# Altium PCB Flyback_PCB.PcbDoc
Units mm, origin at the board's own origin, x right, y up, seen from the top; angles counter-clockwise.
Board outline 106.68 x 88.9 mm, 2 copper layers (Top Layer, Bottom Layer); 95 components, 36 nets, 213 pads, 350 vias.
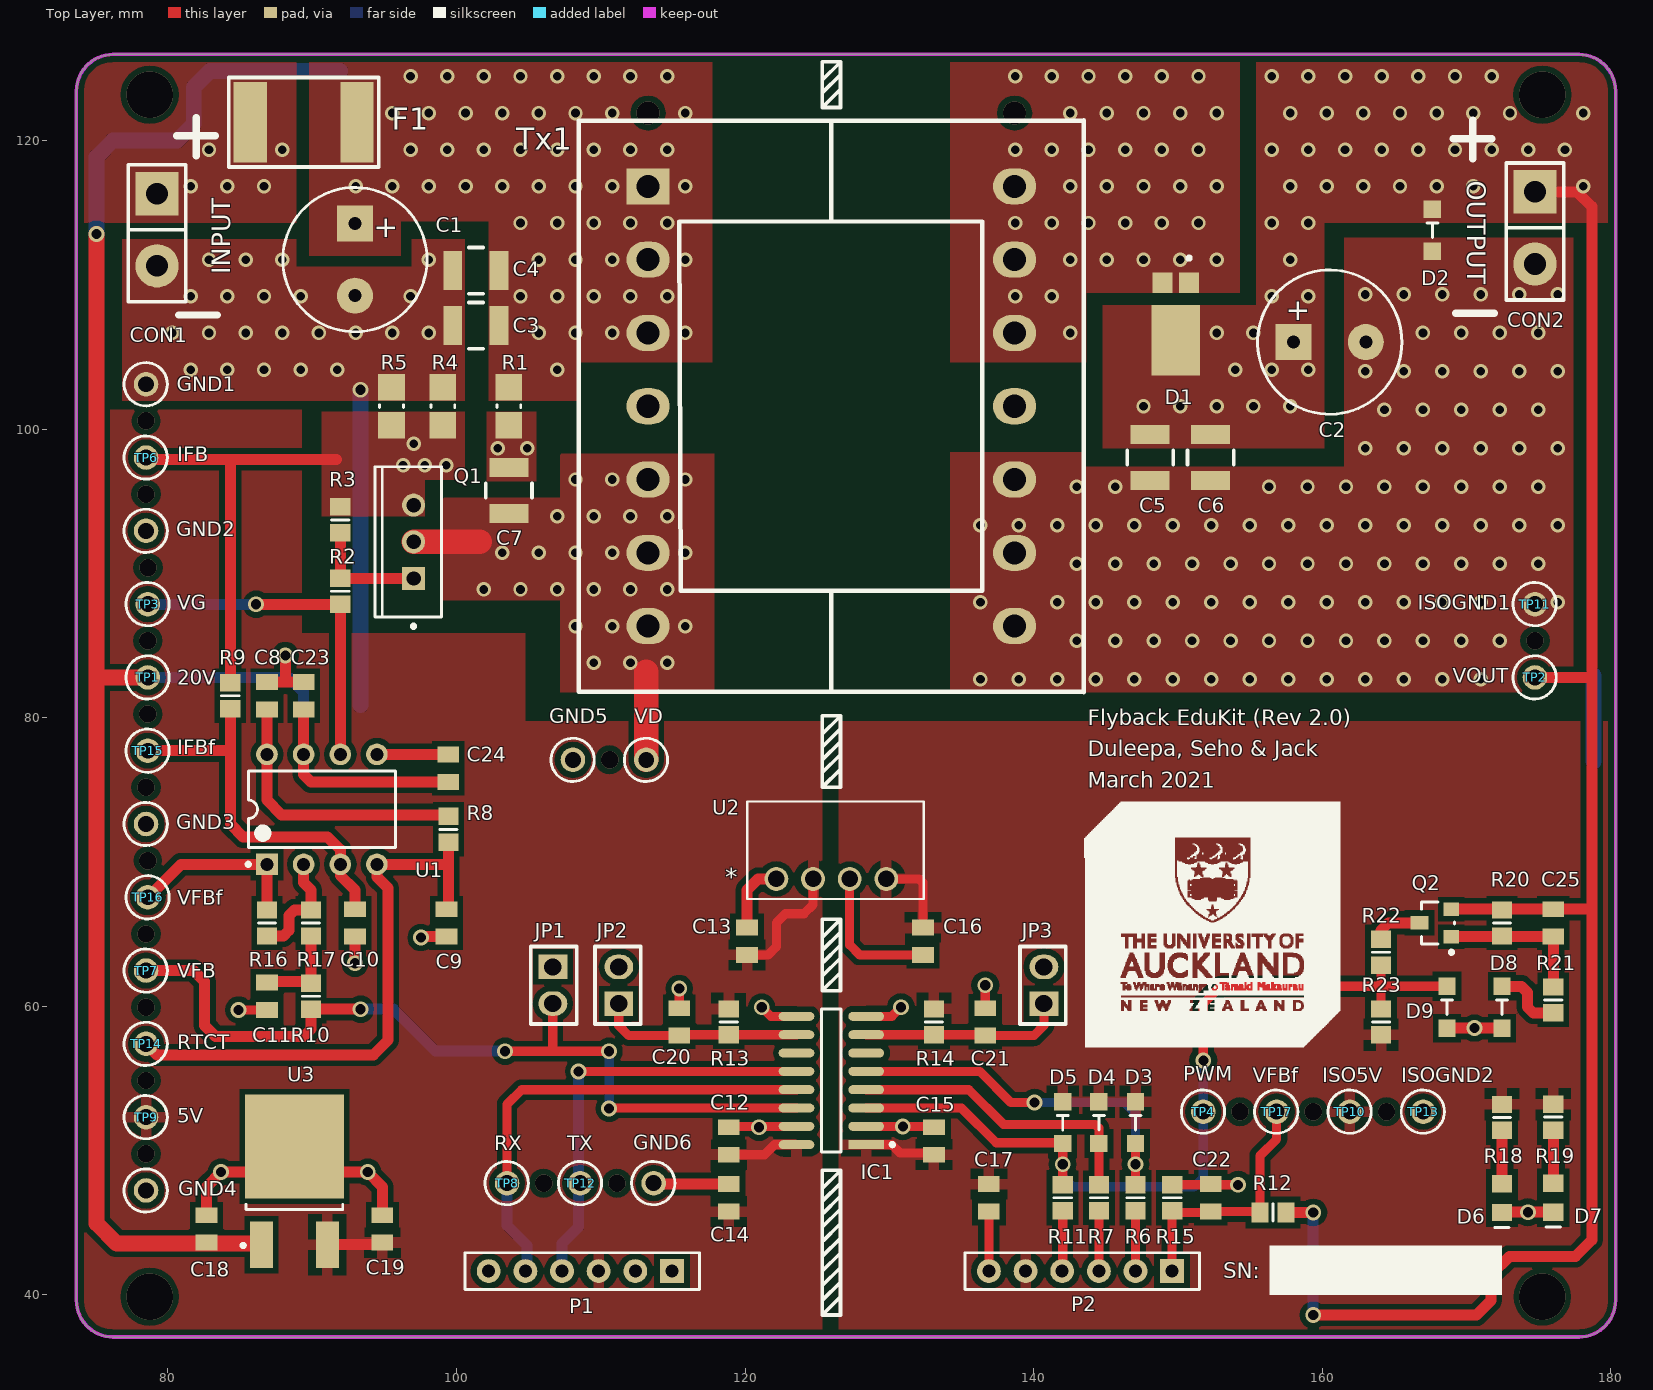
[diagram p0: Top Layer view]
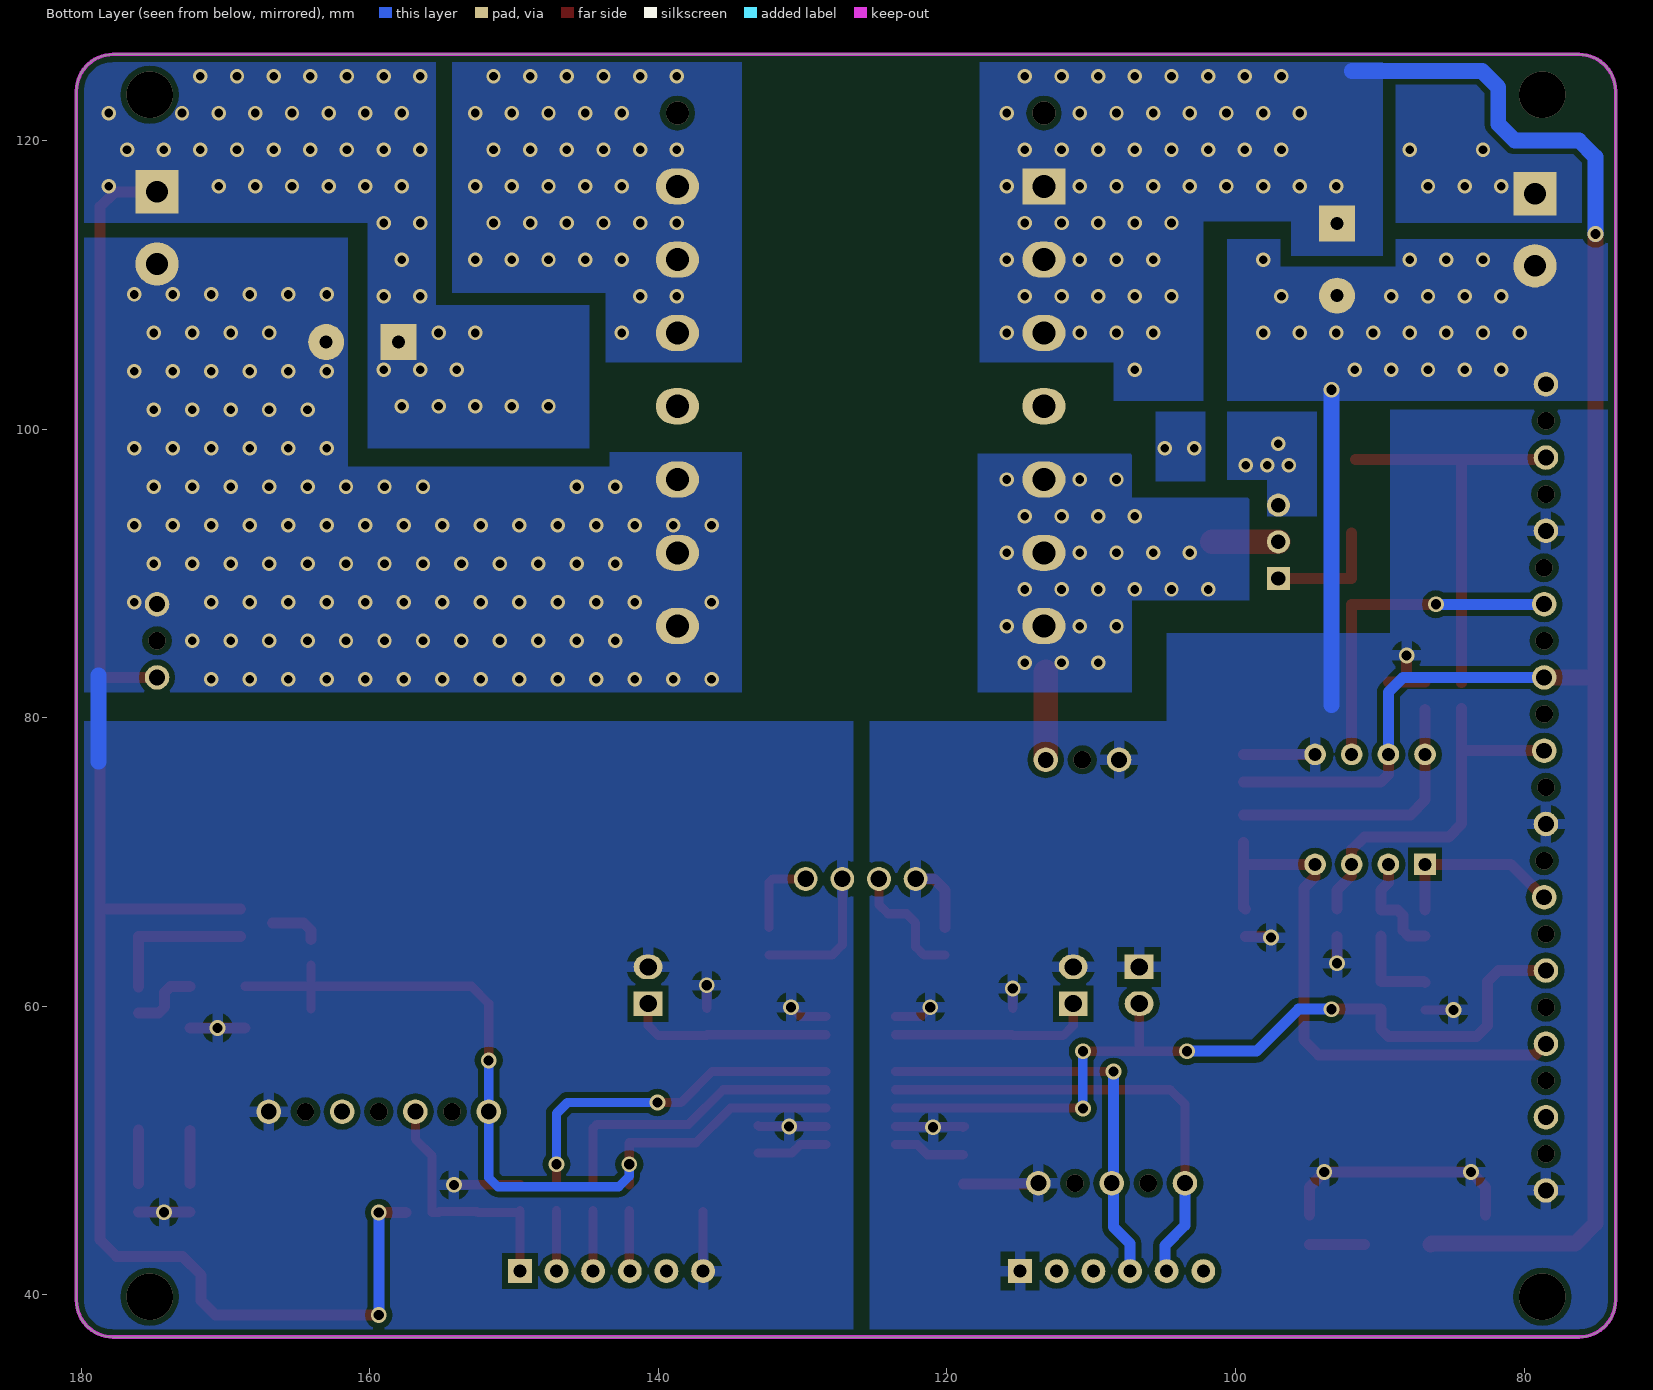
[diagram p1: Bottom Layer view, seen from below]

## Layer stack, top to bottom
Top Solder: solder mask 0.0102, Solder Resist, Dk 3.5
Top Layer: signal copper 0.0356
Dielectric 1: dielectric 0.32, FR-4, Dk 4.8
Bottom Layer: signal copper 0.0356
Bottom Solder: solder mask 0.0102, Solder Resist, Dk 3.5

## Board outline
73.66,39.624 ccw(c76.2,39.624) 76.2,37.084 177.8,37.084 ccw(c177.8,39.624) 180.34,39.624 180.34,123.444 ccw(c177.8,123.444) 177.8,125.984 76.2,125.984 ccw(c76.2,123.444) 73.66,123.444

## Design rules (kind name [scope] priority, off if disabled: settings)
Clearance [All] p1: gap=0.4 ignorepadtopadclearanceinfootprint=FALSE
HoleSize [All] p1: absolutevalues=TRUE maxlimit=25.4 minlimit=0.508 maxpercent=80.000 minpercent=20.000
MinimumSolderMaskSliver [All] p1: minsoldermaskwidth=0.127
PolygonConnect Sec_Logic [IsNamedPolygon('Secondary_Control_ISO_5V') Or IsNamedPolygon('Secondary_Control_ISO_GND')] p1: connectstyle=Relief reliefconductorwidth=0.762 reliefentries=4 polygonreliefangle="90 Angle" airgapwidth=0.508
PolygonConnect Primary_Logic [IsNamedPolygon('Primary_Control_GND') Or IsNamedPolygon('Primary_Control_5V')] p2: connectstyle=Relief reliefconductorwidth=0.762 reliefentries=4 polygonreliefangle="90 Angle" airgapwidth=0.508
PolygonConnect Primary_Power [(InNetClass('Power_pri') Or InNetClass('Power_sec')) vs not (IsNamedPolygon('Primary_Control_GND') Or InNamedPolygon('Secondary_Control_ISO_GND') )] p3: connectstyle=Direct reliefconductorwidth=0.254 reliefentries=4 polygonreliefangle="90 Angle" airgapwidth=0.254
RoutingVias [All] p1: holewidth=0.7 width=1.1 viastyle="Through Hole" minholewidth=0.5 minwidth=0.8 maxholewidth=10 maxwidth=12
SilkToSolderMaskClearance [IsPad] p1: minsilkscreentomaskgap=0.127 clearancetoexposedcopper=TRUE
SolderMaskExpansion [All] p1: expansion=0.102 istentingtop=FALSE
Width [InNetClass('Power_sec')] p1: maxlimit=2 minlimit=0.3 preferedwidth=0.8
27 further rules are at their usual default settings.

## Classes and differential pairs
net class Power_pri: 20V GND I_Fb NetC7_2 NetCON1_1 NetQ1_1 Vd Vg
net class Feedback_sec: EN2 Iso_5V Iso_GND MCU_PWM MCU_RX MCU_TX MCU_VFB MCUP_PWM MCUP_RX MCUP_TX NetC25_1 NetD6_1 NetD7_1 NetD8_2 NetIC1_11 NetP2_2 NetP2_3 NetQ2_3 Vout
net class Power_sec: Iso_GND NetD1_1 Vout
net class Control_pri: 5V 20V COMP EN1 GND I_Fb I_Fb_F NetC11_2 NetIC1_6 NetIC1_11 NetP2_2 NetP2_3 NetP3_1 NetP3_3 NetP3_6 NetP4_5 PC_RX PC_TX RtCt V_Fb V_Fb_F Vg Vref

## Components (designator, comment, footprint, x,y, rotation, side; value= is the part's Value field where it differs from the comment)
C1 "ECAP" CR05 92.964,111.76 r270 top
C2 "ECAP" CR05 160.528,106.045 r0 top
C3 "CCAP1210" C1210 101.346,107.188 r0 top
C4 "CCAP1210" C1210 101.346,110.998 r0 top
C5 "CCAP1210" C1210 148.082,98.044 r90 top
C6 "CCAP1210" C1210 152.273,98.044 r90 top
C7 "CCAP1210" C1210 103.632,95.758 r90 top
C8 "Capacitor 0805" C0805 86.868,81.534 r270 top
C9 "Capacitor 0805" C0805 99.314,65.786 r90 top
C10 "Capacitor 0805" C0805 92.964,65.786 r90 top
C11 "Capacitor 0805" C0805 86.868,60.706 r90 top
C12 "Capacitor 0805" C0805 118.872,50.673 r270 top
C13 "Capacitor 0805" C0805 120.142,64.516 r270 top
C14 "Capacitor 0805" C0805 118.872,46.736 r270 top
C15 "Capacitor 0805" C0805 133.096,50.673 r270 top
C16 "Capacitor 0805" C0805 132.334,64.516 r90 top
C17 "Capacitor 0805" C0805 136.906,46.736 r90 top
C18 "Capacitor 0805" C0805 82.677,44.577 r270 top
C19 "Capacitor 0805" C0805 94.869,44.577 r270 top
C20 "Capacitor 0805" C0805 115.443,58.928 r270 top
C21 "Capacitor 0805" C0805 136.652,58.928 r270 top
C22 "Capacitor 0805" C0805 152.273,46.736 r270 top
C23 "Capacitor 0805" C0805 89.408,81.534 r270 top
C24 "Capacitor 0805" C0805 99.441,76.515 r270 top
C25 "Capacitor 0805" C0805 176.022,65.786 r90 top
CON1 "Header 2X1" HDR2X1_5 79.248,113.792 r270 top
CON2 "Header 2X1" HDR2X1_5 174.752,113.919 r270 top
D1 "SDT5H100P5" POWERDI5 149.86,107.292 r270 top
D2 "Zener" SOD123 167.64,113.792 r90 top
D3 "1N4148" SOD123 147.066,51.943 r90 top
D4 "1N4148" SOD123 144.526,51.943 r90 top
D5 "1N4148" SOD123 142.021,51.943 r90 top
D6 "LED" LED0805 172.466,46.72 r270 top
D7 "LED" LED0805 176.022,46.736 r270 top
D8 "Zener" SOD123 172.466,59.944 r90 top
D9 "Zener" SOD123 168.656,59.944 r90 top
F1 "Fuse Resettable" "0ZCF SERIES" 89.408,121.285 r0 top value=60V/1A
GND1 "GND" "TESTPOINT - 1MM" 78.486,103.124 r0 top
GND2 "GND" "TESTPOINT - 1MM" 78.486,92.964 r0 top
GND3 "GND" "TESTPOINT - 1MM" 78.486,72.644 r0 top
GND4 "GND" "TESTPOINT - 1MM" 78.486,47.244 r0 top
GND5 "GND" "TESTPOINT - 1MM" 108.077,77.089 r0 top
GND6 "GND" "TESTPOINT - 1MM" 113.665,47.752 r0 top
IC1 "SI8631AB-B-IS1R" SOIC16 125.984,54.864 r180 top
JP1 "Header 2X1" HDR2X1_2P54 106.68,62.738 r0 top
JP2 "Header 2X1" HDR2X1_2P54 111.252,60.198 r180 top
JP3 "Header 2X1" HDR2X1_2P54 140.716,60.198 r180 top
P1 "Header 6X1" HDR6X1_2P54 114.935,41.656 r180 top
P2 "Header 6X1" HDR6X1_2P54 149.606,41.656 r180 top
Q1 "MOSFET" TO220 97.028,92.202 r180 top
Q2 "BC807-25LT1G" SOT23SM 167.894,65.786 r180 top
R1 "Resistor 1206" R1206 103.632,101.6 r90 top
R2 "Resistor 0805" R0805 91.948,88.773 r90 top
R3 "Resistor 0805" R0805 91.948,93.726 r270 top
R4 "Resistor 1206" R1206 99.06,101.6 r270 top
R5 "Resistor 1206" R1206 95.504,101.6 r270 top
R6 "Resistor 0805" R0805 147.066,46.736 r90 top
R7 "Resistor 0805" R0805 144.526,46.736 r90 top
R8 "Resistor 0805" R0805 99.441,72.274 r270 top
R9 "Resistor 0805" R0805 84.328,81.534 r90 top
R10 "Resistor 0805" R0805 89.916,60.706 r270 top
R11 "Resistor 0805" R0805 142.021,46.736 r90 top
R12 "Resistor 0805" R0805 156.591,45.72 r0 top
R13 "Resistor 0805" R0805 118.872,58.928 r90 top
R14 "Resistor 0805" R0805 133.096,58.928 r90 top
R15 "Resistor 0805" R0805 149.606,46.736 r270 top
R16 "Resistor 0805" R0805 86.868,65.786 r90 top
R17 "Resistor 0805" R0805 89.916,65.786 r90 top
R18 "Resistor 0805" R0805 172.466,52.308 r90 top
R19 "Resistor 0805" R0805 176.022,52.324 r90 top
R20 "Resistor 0805" R0805 172.466,65.786 r90 top
R21 "Resistor 0805" R0805 176.022,60.452 r90 top
R22 "Resistor 0805" R0805 164.084,63.754 r270 top
R23 "Resistor 0805" R0805 164.084,58.928 r270 top
TP1 "20V" "TESTPOINT - 1MM" 78.613,82.804 r0 top
TP2 "VOUT" "TESTPOINT - 1MM" 174.752,82.804 r0 top
TP3 "VG" "TESTPOINT - 1MM" 78.613,87.884 r0 top
TP4 "PWM" "TESTPOINT - 1MM" 151.765,52.705 r0 top
TP6 "IFB" "TESTPOINT - 1MM" 78.486,98.044 r0 top
TP7 "VFB" "TESTPOINT - 1MM" 78.486,62.484 r0 top
TP8 "RX" "TESTPOINT - 1MM" 103.505,47.752 r0 top
TP9 "5V" "TESTPOINT - 1MM" 78.486,52.324 r0 top
TP10 "ISO5V" "TESTPOINT - 1MM" 161.925,52.705 r0 top
TP11 "ISOGND1" "TESTPOINT - 1MM" 174.752,87.884 r0 top
TP12 "TX" "TESTPOINT - 1MM" 108.585,47.752 r0 top
TP13 "ISOGND2" "TESTPOINT - 1MM" 167.005,52.705 r0 top
TP14 "RTCT" "TESTPOINT - 1MM" 78.486,57.404 r0 top
TP15 "IFBf" "TESTPOINT - 1MM" 78.613,77.724 r0 top
TP16 "VFBf" "TESTPOINT - 1MM" 78.613,67.564 r0 top
TP17 "VFBf" "TESTPOINT - 1MM" 156.845,52.705 r0 top
Tx1 "Inductor" ETD34 125.984,101.6 r0 top
U1 "UC3843" DIP-8 90.678,73.66 r90 top value=Value
U2 "RFM-0505S" RFM-0505S_RCP 122.174,68.834 r0 top
U3 "REG78M05" TO252 88.773,47.879 r90 top
VD "VD" "TESTPOINT - 1MM" 113.157,77.089 r0 top

## Footprints (in the part's own frame and the unit in brackets; to place one, negate y for a bottom-side part, rotate by r counter-clockwise, add the part's x,y. Pads: shape width x height; smd on the part's side, far side on the other; paste and mask are expansions set on the pad)
"0ZCF SERIES" [mm] "0ZCF Series SMD Reset Fuse"
  rect 2.3x5.6 smd: 1(-3.7,0) 2(3.7,0)
  silkscreen extent -5.2,-3.1 5.2,3.1, body extent -3.99,-2.72 3.99,2.72, height 1.15
C0805 [mm]
  rect 1.1x1.5 smd: 1(-0.95,0) 2(0.95,0)
  body extent -1.1,-0.72 1.1,0.72, height 1.1
C1210 [mm]
  rect 1.3x2.7 smd: 1(-1.6,0) 2(1.6,0)
  silkscreen extent -0.5,-1.6 0.5,1.6, body extent -1.8,-1.4 1.8,1.4, height 1.24
CR05 [mm]
  rect 2.5x2.5 hole 0.9: 1(-2.5,0)
  round 2.5 hole 0.9: 2(2.5,0)
  silkscreen extent -5,-5 5,5
DIP-8 [mm] "DIP, 8-Leads, Body 10.15x6.6mm, Pitch 2.54mm"
  rect 1.5x1.5 hole 0.9: 1(-3.81,3.81)
  round 1.5 hole 0.9: 2(-3.81,1.27) 3(-3.81,-1.27) 4(-3.81,-3.81) 5(3.81,-3.81) 6(3.81,-1.27) 7(3.81,1.27) 8(3.81,3.81)
  silkscreen extent -3.93,-5.1 2.65,5.23, body extent -3.87,-5.71 4,5.71, height 4.19
ETD34 [mm]
  rect 3x2.5 hole 1.6: 1(-12.7,15.24)
  oval 3x2.5 hole 1.6: 2(-12.7,10.16) 3(-12.7,5.08) 4(-12.7,0) 5(-12.7,-5.08) 6(-12.7,-10.16) 7(-12.7,-15.24) 8(12.7,-15.24) 9(12.7,-10.16) 10(12.7,-5.08) 11(12.7,0) 12(12.7,5.08) 13(12.7,10.16) 14(12.7,15.24)
  silkscreen extent -17.5,-19.81 17.5,19.81
HDR2X1_2P54 [mm] "Polarised Header 2 way"
  rect 2x1.7 hole 1.2: 1(0,0)
  oval 2x1.7 hole 1.2: 2(0,-2.54)
  silkscreen extent -1.52,-3.96 1.65,1.42
HDR2X1_5 [mm]
  rect 3x3 hole 1.5: 1(-2.54,0)
  round 3 hole 1.5: 2(2.46,0)
  silkscreen extent -4.54,-2 4.96,2
HDR6X1_2P54 [mil] "Connector for BLE"
  rect 65x65 hole 35.43: 1(0,0)
  round 65 hole 35.43: 2(100,0) 3(200,0) 4(300,0) 5(400,0) 6(500,0)
  silkscreen extent -75,-50 565,50, body extent -55,-50 545,50, height 334
LED0805 [mm]
  rect 1.2x1.4 smd: 1(-1,0) 2(1,0)
  silkscreen extent 2.03,-0.5 2.03,0.5, body extent -1.07,-0.7 1.07,0.7, height 0.65
POWERDI5 [mm]
  rect 1.4x1.39 smd: 1(-2.862,-0.92) 1(-2.862,0.92)
  rect 4.86x3.36 smd: 3(1.12,0)
  silkscreen extent -4.7,0.8 -4.45,1.05
R0805 [mm]
  rect 1.2x1.4 smd: 1(-0.9,0) 2(0.9,0)
  silkscreen extent 0,-0.6 0,0.6, body extent -1.07,-0.7 1.07,0.7, height 0.65
R1206 [mm] "Chip Resistor, 2-Leads, Body 3.20x1.60mm, IPC Low Density"
  rect 1.85x1.85 smd: 1(-1.325,0) 2(1.325,0)
  silkscreen extent -0.1,-0.82 0.1,0.82, body extent -1.7,-0.87 1.7,0.87, height 0.65
RFM-0505S_RCP [mil]
  round 65 hole 45 mask+0: 1(0,0) 2(100,0) 3(200,0) 4(300,0)
  silkscreen extent -80,-54 402,212, body extent 0,0 10,10, height 10
SOD123 [mm] "SODFL, 2-Leads, Body 1.60x3.50mm, IPC Low Density"
  rect 1.2x1.2 smd: 1(-1.45,0) 2(1.45,0)
  silkscreen extent -0.51,-0.38 0.51,0.38, body extent -1.35,-0.85 1.35,0.85, height 1.1
SOIC16 [mm]
  rect 2.474x0.622 smd paste+0 mask+0: 1(-2.416,4.445)
  rrect100% 2.474x0.622 smd paste+0 mask+0: 2(-2.416,3.175) 3(-2.416,1.905) 4(-2.416,0.635) 5(-2.416,-0.635) 6(-2.416,-1.905) 7(-2.416,-3.175) 8(-2.416,-4.445) 9(2.416,-4.445) 10(2.416,-3.175) 11(2.416,-1.905) 12(2.416,-0.635) 13(2.416,0.635) 14(2.416,1.905) 15(2.416,3.175) 16(2.416,4.445)
  silkscreen extent -4.35,-4.95 0.68,4.95, body extent -4.15,-5.45 4.15,5.45, height 0.25
SOT23SM [mil] "SOT23 Medium Intensity"
  rect 42x36 smd: 1(-42,37.49) 2(-42,-37.51)
  rect 50x36 smd: 3(45,-0.51)
  silkscreen extent -50,-58 40,85, body extent -46,-57 46,57, height 39
"TESTPOINT - 1MM" [mm]
  round 1.7 hole 1.1: 1(0,0)
  silkscreen extent -1.52,-1.5 1.48,1.5, body extent -1.27,-1.27 1.27,1.27, height 4.89
TO220 [mm] "FM, 3-Leads, Body 10.03x8.98mm, Pitch 2.54mm"
  rect 1.6x1.6 hole 1: 1(0,2.54)
  round 1.6 hole 1: 2(0,0) 3(0,-2.54)
  silkscreen extent -1.93,-5.2 2.67,5.97, body extent -1.93,-5.2 2.67,5.2, height 20.75
TO252 [mm] "D-PAK, 4-Leads, Body 6.1x6.5mm, Pitch 2.28mm, Lead Span 9.7mm, IPC Low Density"
  rect 3.2x1.6 smd: 1(-4.392,2.28) 3(-4.392,-2.28)
  rect 7.2x6.85 smd: 4(2.408,0)
  silkscreen extent -4.57,-3.35 -1.59,3.68, body extent -1.94,-3.35 4.26,3.35, height 2.38

## Part data
C8 C9 C10 C11 C12 C13 C14 C15 C16 C17 C18 C19 C20 C21 C22 C23 C24 C25: library part CCAP0805, "CCAP0805"
CON1 CON2 JP1 JP2 JP3: library part HDR2X1
D1: "Schottky Diode", Supplier Part Number 1=SDT5H100P5-7DIDKR-ND, Supplier 1=Digi-Key
D2 D8 D9: "Zener Diode"
D3 D4 D5: "Signal Diode - 1N4148", Supplier Part Number 1=1N4148WTCT-ND, Supplier 1=Digi-Key
F1: library part "FuseResettable 0ZCF0100AF2A", "PTC RESET FUSE 60V 1A 2920", Manufacturer="Bel Fuse Inc.", MPN=0ZCF0100AF2A, Supplier Part Number 1=507-2070-1-ND, Part Description="PTC RESET FUSE 60V 1A 2920", Supplier 1=Digi-Key, Supplier 2=Mouser, Supplier Part Number 2=530-0ZCF0100AF2A, Type="Surface mount"
GND1 GND2 GND3 GND4 GND5 GND6 TP1 TP2 TP3 TP4 TP6 TP7 TP8 TP9 TP10 TP11 TP12 TP13 TP14 TP15 TP16 TP17 VD: library part TP, "Testpoint"
IC1 U2: "No Description Available", Copyright="Copyright (C) 2018 Accelerated Designs. All rights reserved", RefDes=RefDes, Type=DEV
  IC1: Datasheet=https://www.silabs.com/documents/public/data-sheets/si86xx-1Mbps-datasheet.pdf, Manufacturer_Part_Number=SI8631AB-B-IS1R, SourceLibrary=Silicon_Labs_2020-10-01, Vendor="Silicon Labs"
  U2: Built_By=EMA_Cory, Manufacturer_Part_Number=RFM-0505S, SourceLibrary=Recom_Power_2020-01-16, Vendor="Recom Power"
P1 P2: library part HDR6X1, "Header, 6-Pin", LatestRevisionDate=17-Jul-2002, LatestRevisionNote="Re-released for DXP Platform.", Publisher="Altium Limited"
Q1: library part NFET1, "NFET TO220"
Q2: library part BC807, "General Purpose Transistor, PNP Silicon, 3-Pin SOT-23, Pb-Free, Tape and Reel", Manufacturer="On Semiconductor", ComponentLink1Description="Manufacturer URL", ComponentLink1URL=http://www.onsemi.com/, ComponentLink2Description=Datasheet, ComponentLink2URL=http://www.onsemi.com/pub_link/Collateral/BC807-16LT1-D.PDF, ComponentLink3Description="Package Specification", ComponentLink3URL=http://www.onsemi.cn/pub_link/Collateral/318-08.PDF, DatasheetVersion="Rev. 10", fT Min (MHz)=100, IC Continuous (A)=-0.5, Mounting Technology="Surface Mount", PackageDescription="3-Pin Small Outline Transistor, Body 2.92 x 1.3 mm, Pitch 0.95 mm", PackageReference=SOT-23-3-318-08, PackageVersion="Rev. AP, 11/2009", Packing="Tape and Reel", PartNumber=BC807-25LT1G, Polarity=PNP, RoHS=TRUE
R1 R4 R5: library part RES1206, "RES1206"
R2 R3 R12 R15: library part RES0805, "RES0805", Resistance=10R
R6 R7 R8 R9 R10 R11 R13 R14 R16 R17 R18 R19 R20 R21 R22 R23: library part RES0805, "RES0805"
Tx1: library part "Transformer EFD34", "Inductor with core"
U1: "No Description Available", Manufacturer="Texas Instruments", PartNumber=UC3843N, Copyright="Copyright (C) 2018 Accelerated Designs. All rights reserved", RefDes=RefDes, Type=DEV
U3: library part REG78MXX, "78M Series Linear Regulators"

## Via types
v1: diameter 1, hole 0.6, Top Layer to Bottom Layer, 297 vias
v2: diameter 1.1, hole 0.7, Top Layer to Bottom Layer, 29 vias
v3: diameter 1.2, hole 1.2, Top Layer to Bottom Layer, 18 vias
v4: diameter 3.2, hole 3.2, Top Layer to Bottom Layer, 4 vias
v5: diameter 1.6, hole 1.6, Top Layer to Bottom Layer, 2 vias

## Nets (pads, with @x,y where several pads share a name; then routed paths per layer and width w, separated by ;. In a path a pad name is that pad's centre, name@x,y a point inside that pad or via, vN(x,y) a via of type N, cw(c..) or ccw(c..) an arc to the next point about the centre after c; other vN are vias at no path point)
5V: C12.2 C13.2 C14.2 C19.2 IC1.16 P1.3 R13.2 TP9.1 U2.2 U3.3 | length 17.6
  Top Layer w0.635: C12.2 121.351,49.723 122.047,50.419 IC1.16 ; C13.2 121.605,63.566 122.174,64.135 122.174,65.786 122.809,66.421 124.079,66.421 124.714,67.056 U2.2
  Top Layer w0.762: U3.3 C19.2@94.869,43.487
20V: C1.1 C3.2 C4.2 C18.2 C23.2 C24.2 F1.2 R1.2 TP1.1 Tx1.1 Tx1.2 Tx1.3 U1.7 U3.1 | length 140.7
  Top Layer w0.762: C23.2 U1.7 89.408,76.073 89.916,75.565 C24.2
  Top Layer w1.1: v2(75.057,113.538) 75.057,82.804 ; TP1.1 75.057,82.804 ; U3.1 86.419,43.561 76.454,43.561 75.057,44.958 75.057,82.804
  Bottom Layer w0.762: TP1.1 88.392,82.804 89.408,81.788 U1.7
  Bottom Layer w1.1: v2(75.057,113.538) 75.057,118.872 76.2,120.015 80.645,120.015 81.788,121.158 81.788,123.698 82.931,124.841 91.948,124.841
  other v1: 106.98,104.14 105.71,106.68 108.25,106.68 110.79,106.68 115.87,106.68 104.44,109.22 106.98,109.22 109.52,109.22 112.06,109.22 114.6,109.22 105.71,111.76 108.25,111.76 110.79,111.76 115.87,111.76 104.44,114.3 106.98,114.3 109.52,114.3 112.06,114.3 114.6,114.3 93.01,116.84 95.55,116.84 98.09,116.84 100.63,116.84 103.17,116.84 105.71,116.84 108.25,116.84 110.79,116.84 115.87,116.84 96.82,119.38 99.36,119.38 101.9,119.38 104.44,119.38 106.98,119.38 109.52,119.38 112.06,119.38 114.6,119.38 95.55,121.92 98.09,121.92 100.63,121.92 103.17,121.92 105.71,121.92 108.25,121.92 110.79,121.92 115.87,121.92 96.82,124.46 99.36,124.46 101.9,124.46 104.44,124.46 106.98,124.46 109.52,124.46 112.06,124.46 114.6,124.46
COMP: R16.2 TP16.1 U1.1 | length 12.4
  Top Layer w0.762: TP16.1 80.899,69.85 U1.1 R16.2
EN1: C20.2 IC1.10 JP2.1 R13.1 | length 14.2
  Top Layer w0.635: JP2.1 111.252,58.674 111.948,57.978 C20.2 115.504,58.039 118.872,58.039 IC1.10
EN2: C21.2 IC1.7 JP3.1 R14.1 | length 14.4
  Top Layer w0.635: IC1.7 132.842,58.039 C21.2@136.652,58.039 ; R14.1@132.842,58.028 R14.1 ; C21.2 140.02,57.978 140.716,58.674 JP3.1
GND: C1.2 C3.1 C4.1 C8.1 C9.1 C10.1 C11.1 C12.1 C13.1 C14.1 C18.1 C19.1 C20.1 C23.1 C24.1 CON1.2 GND1.1 GND2.1 GND3.1 GND4.1 GND5.1 GND6.1 IC1.9 IC1.15 JP1.1 JP2.2 P1.1 R4.1 R5.1 U1.5 U2.1 U3.4 | length 72.8
  Top Layer w0.635: v2(84.902,59.756) C11.1 ; v2(115.44,61.246) 115.44,59.881 C20.1 ; C12.1@118.806,51.689 C12.1 118.938,51.689 IC1.15 ; v2(121.158,59.944) 121.793,59.309 IC1.9
  Top Layer w0.762: C18.1 82.677,47.498 v2(83.693,48.514) v2(93.853,48.514) 94.869,47.498 C19.1 ; C8.1 88.138,82.484 ; v2(88.138,84.328) 88.138,82.484 ; C23.1 88.138,82.484 ; v2(92.964,62.992) C10.1 ; U1.5 C24.1@99.441,77.47 ; v2(97.536,64.77) 97.602,64.836 C9.1 ; GND6.1@113.665,47.686 C14.1 ; C13.1 120.142,68.072 120.904,68.834 U2.1
  Bottom Layer w1.1: 93.345,80.904 v2(93.345,102.743)
  other v1: 81.58,104.14 84.12,104.14 86.66,104.14 89.2,104.14 91.74,104.14 80.31,106.68 82.85,106.68 85.39,106.68 87.93,106.68 90.47,106.68 93.01,106.68 95.55,106.68 98.09,106.68 81.58,109.22 84.12,109.22 86.66,109.22 89.2,109.22 96.82,109.22 82.85,111.76 85.39,111.76 87.93,111.76 98.09,111.76
  other v2: 120.965,51.623
I_Fb: Q1.3 R3.1 R4.2 R5.2 R9.2 TP6.1 | length 28.7
  Top Layer w0.762: TP6.1 78.613,97.917 84.328,97.917 ; R9.2 84.328,92.964 84.328,97.917 ; 91.675,97.917 84.328,97.917
  other v1: 96.3,97.5 97.8,97.5 99.3,97.5 97.05,99
I_Fb_F: C10.2 R9.1 TP15.1 U1.3 | length 26.7
  Top Layer w0.762: TP15.1 84.201,77.724 84.328,77.597 ; R9.1 84.328,77.597 ; C10.2 92.964,68.072 91.948,69.088 U1.3 91.948,70.866 91.059,71.755 85.217,71.755 84.328,72.644 84.328,77.597
Iso_5V: C15.2 C16.2 C17.2 D3.2 D4.2 D5.2 IC1.1 P2.5 R14.2 R18.2 R19.2 R23.2 TP10.1 U2.4 | length 10.7
  Top Layer w0.635: IC1.1 130.175,50.419 130.744,49.85 C15.2@133.096,49.85 ; U2.4 132.08,68.834 132.334,68.58 C16.2
Iso_GND: C2.2 C5.1 C6.1 C15.1 C16.1 C17.1 C21.1 C22.1 CON2.2 D2.1 D6.2 D7.2 D8.1 D9.1 IC1.2 IC1.8 JP3.2 P2.6 R15.1 TP11.1 TP13.1 Tx1.8 Tx1.9 Tx1.10 U2.3 | length 41
  Top Layer w0.635: U2.3 127.254,64.262 127.95,63.566 C16.1 ; IC1.2 v2(130.937,51.689) 133.035,51.689 C15.1@133.096,51.75 ; IC1.8 130.175,59.309 v2(130.81,59.944) ; C21.1 v2(136.652,61.468) ; P2.6 C17.1 ; R15.1 v2(154.178,47.636)
  Top Layer w0.762: D9.1 D8.1 ; D6.2@172.466,45.736 v2(174.26,45.736) D7.2
  Bottom Layer w1.1: 178.816,76.962 178.816,82.931
  other v1: 136.317,82.677 138.984,82.677 141.651,82.677 144.318,82.677 146.985,82.677 149.652,82.677 152.319,82.677 154.986,82.677 157.653,82.677 160.32,82.677 162.987,82.677 165.654,82.677 168.321,82.677 170.988,82.677 142.984,85.344 145.651,85.344 148.318,85.344 150.985,85.344 153.652,85.344 156.319,85.344 158.986,85.344 161.653,85.344 164.32,85.344 166.987,85.344 169.654,85.344 172.321,85.344 136.317,88.011 141.651,88.011 144.318,88.011 146.985,88.011 149.652,88.011 152.319,88.011 154.986,88.011 157.653,88.011 160.32,88.011 162.987,88.011 165.654,88.011 168.321,88.011 170.988,88.011 176.322,88.011 142.984,90.678 145.651,90.678 148.318,90.678 150.985,90.678 153.652,90.678 156.319,90.678 158.986,90.678 161.653,90.678 164.32,90.678 166.987,90.678 169.654,90.678 172.321,90.678 174.988,90.678 136.317,93.345 138.984,93.345 141.651,93.345 144.318,93.345 146.985,93.345 149.652,93.345 152.319,93.345 154.986,93.345 157.653,93.345 160.32,93.345 162.987,93.345 165.654,93.345 168.321,93.345 170.988,93.345 173.655,93.345 176.322,93.345 142.984,96.012 145.651,96.012 156.319,96.012 158.986,96.012 161.653,96.012 164.32,96.012 166.987,96.012 169.654,96.012 172.321,96.012 174.988,96.012 162.987,98.679 165.654,98.679 168.321,98.679 170.988,98.679 173.655,98.679 176.322,98.679 164.32,101.346 166.987,101.346 169.654,101.346 172.321,101.346 174.988,101.346 162.987,104.013 165.654,104.013 168.321,104.013 170.988,104.013 173.655,104.013 176.322,104.013 166.987,106.68 169.654,106.68 172.321,106.68 174.988,106.68 162.987,109.347 165.654,109.347 168.321,109.347 170.988,109.347 173.655,109.347 176.322,109.347
  other v2: 170.561,58.494
MCU_PWM: P2.4 R11.1 | length 4.2
  Top Layer w0.635: P2.4 142.021,41.691 R11.1
MCU_RX: P2.2 R6.1 | length 4.2
  Top Layer w0.635: P2.2 R6.1
MCU_TX: P2.3 R7.1 | length 4.2
  Top Layer w0.635: P2.3 R7.1
MCU_VFB: C22.2 P2.1 R12.1 R15.2 TP17.1 | length 17.8
  Top Layer w0.635: P2.1 R15.2 149.722,45.72 152.527,45.72 152.593,45.786 155.178,45.786 155.244,45.72 R12.1 155.691,49.646 156.845,50.8 TP17.1
MCUP_PWM: D5.1 D9.2 IC1.3 R11.2 R22.2 R23.1 TP4.1 | length 61.2
  Top Layer w0.635: IC1.3 135.001,52.959 137.414,50.546 142.021,50.546 D5.1 v2(142.021,49.065) R11.2 ; v2(151.765,56.261) 151.765,60.198 152.961,61.394 164.084,61.394 ; R23.1 164.084,61.394 ; R22.2 164.084,61.394 ; D9.2 164.084,61.394
  Bottom Layer w0.635: v2(142.021,49.065) 142.021,48.225 142.748,47.498 151.13,47.498 151.765,48.133 TP4.1 v2(151.765,56.261)
MCUP_RX: D3.1 IC1.5 R6.2 | length 26.2
  Top Layer w0.635: IC1.5 136.271,55.499 138.43,53.34 v2(140.074,53.34) ; R6.2 v2(147.066,49.065) D3.1
  Bottom Layer w0.635: v2(140.074,53.34) 146.304,53.34 147.066,52.578 v2(147.066,49.065)
MCUP_TX: D4.1 IC1.4 R7.2 | length 21.2
  Top Layer w0.635: IC1.4 135.509,54.229 137.922,51.816 144.272,51.816 144.526,51.562 D4.1 R7.2
NetC7_2: C7.2 R1.1
  other v1: 102.87,98.679 104.902,98.679
NetC11_2: C11.2 R10.1 R17.1 | length 6.2
  Top Layer w0.762: C11.2 86.934,61.722 89.916,61.722 R17.1
NetC25_1: C25.1 Q2.1 R20.1 R21.2 | length 10.5
  Top Layer w0.762: Q2.1 168.963,64.836 C25.1 R21.2
NetCON1_1: CON1.1 F1.1
  other v1: 81.58,116.84 84.12,116.84 86.66,116.84 82.85,119.38 87.93,119.38
NetD1_1: D1.1 Tx1.12 Tx1.13 Tx1.14
  other v1: 142.54,106.68 138.73,109.22 141.27,109.22 142.54,111.76 145.08,111.76 147.62,111.76 150.16,111.76 152.7,111.76 138.73,114.3 141.27,114.3 143.81,114.3 146.35,114.3 148.89,114.3 151.43,114.3 142.54,116.84 145.08,116.84 147.62,116.84 150.16,116.84 152.7,116.84 138.73,119.38 141.27,119.38 143.81,119.38 146.35,119.38 148.89,119.38 151.43,119.38 142.54,121.92 145.08,121.92 147.62,121.92 150.16,121.92 152.7,121.92 138.73,124.46 141.27,124.46 143.81,124.46 146.35,124.46 148.89,124.46 151.43,124.46
NetD6_1: D6.1 R18.1 | length 3.7
  Top Layer w0.762: D6.1 R18.1
NetD7_1: D7.1 R19.1 | length 3.7
  Top Layer w0.762: D7.1 R19.1
NetD8_2: D8.2 R21.1 | length 4.9
  Top Layer w0.762: D8.2 173.81,61.394 174.244,60.96 174.244,59.944 174.636,59.552 R21.1
NetQ1_1: Q1.1 R2.2 R3.2 | length 8.2
  Top Layer w0.762: R3.2 R2.2 97.017,89.673 Q1.1
NetQ2_3: Q2.3 R22.1 | length 3.5
  Top Layer w0.762: R22.1 164.084,65.278 164.605,65.799 Q2.3
PC_RX: IC1.13 P1.5 TP8.1 | length 32.7
  Top Layer w0.635: TP8.1 103.505,53.213 104.521,54.229 IC1.13
  Bottom Layer w0.635: P1.5 P1.5@104.902,41.783
  Bottom Layer w0.762: TP8.1 103.505,44.831 104.902,43.434 P1.5@104.902,41.783
PC_TX: IC1.12 P1.4 TP12.1 | length 29.4
  Top Layer w0.635: v2(108.458,55.496) 108.458,55.499 IC1.12
  Bottom Layer w0.762: P1.4 107.315,43.561 108.458,44.704 108.458,55.474 v2(108.458,55.496)
RtCt: C9.2 R8.2 TP14.1 U1.4 | length 39.7
  Top Layer w0.762: TP14.1 79.248,56.642 94.234,56.642 95.25,57.658 95.25,68.199 94.488,68.961 U1.4 99.441,69.85 ; C9.2 99.441,66.863 99.441,69.85 ; R8.2 99.441,69.85
V_Fb: IC1.14 JP1.2 R10.2 TP7.1 | length 58.8
  Top Layer w0.635: v2(103.378,56.896) 106.68,56.896 ; JP1.2 106.68,56.896 ; v2(110.585,52.927) 110.617,52.959 IC1.14 ; v2(110.585,56.896) 106.68,56.896
  Top Layer w0.762: TP7.1 81.788,62.484 82.55,61.722 82.55,58.674 83.312,57.912 89.408,57.912 89.916,58.42 R10.2 v2(93.356,59.806)
  Bottom Layer w0.635: v2(110.585,52.927) v2(110.585,56.896)
  Bottom Layer w0.762: v2(93.356,59.806) 95.642,59.806 98.552,56.896 v2(103.378,56.896)
V_Fb_F: R16.1 R17.2 U1.2 | length 7.8
  Top Layer w0.762: R16.1 88,64.886 88.392,65.278 88.392,66.294 88.784,66.686 R17.2 89.916,68.072 89.408,68.58 U1.2
Vd: C7.1 Q1.2 Tx1.5 Tx1.6 Tx1.7 VD.1 | length 10.7
  Top Layer w1.7: Q1.2 101.6,92.202 ; VD.1 113.157,83.185
  other v1: 109.52,83.82 112.06,83.82 114.6,83.82 108.25,86.36 110.79,86.36 115.87,86.36 101.9,88.9 104.44,88.9 106.98,88.9 109.52,88.9 112.06,88.9 114.6,88.9 103.17,91.44 105.71,91.44 108.25,91.44 110.79,91.44 115.87,91.44 106.98,93.98 109.52,93.98 112.06,93.98 114.6,93.98 108.25,96.52 110.79,96.52 115.87,96.52
Vg: R2.1 TP3.1 U1.6 | length 24
  Top Layer w0.762: TP3.1@78.359,87.873 78.624,87.873 TP3.1 ; v2(86.117,87.873) R2.1 U1.6
  Bottom Layer w0.762: TP3.1 78.624,87.873 v2(86.117,87.873)
Vout: C2.1 C5.2 C6.2 C25.2 CON2.1 D1.3 D2.2 Q2.2 R12.2 R20.2 TP2.1 | length 121.2
  Top Layer w0.762: R12.2 v2(159.385,45.72) ; v2(159.385,38.608) 170.688,38.608 171.704,39.624 171.704,41.402 172.974,42.672 177.546,42.672 178.689,43.815 178.689,66.802 ; Q2.2 168.963,66.736 C25.2 178.623,66.736 178.689,66.802 ; TP2.1 178.689,82.804 ; CON2.1 177.673,116.459 178.689,115.443 178.689,82.804 ; 178.689,66.802 178.689,82.804
  Bottom Layer w0.762: v2(159.385,38.608) v2(159.385,45.72)
  other v1: 147.62,101.6 150.16,101.6 152.7,101.6 155.24,101.6 157.78,101.6 153.97,104.14 156.51,104.14 159.05,104.14 152.7,106.68 155.24,106.68 156.51,109.22 159.05,109.22 157.78,111.76 156.51,114.3 159.05,114.3 157.78,116.84 160.32,116.84 162.86,116.84 165.4,116.84 167.94,116.84 170.48,116.84 178.1,116.84 156.51,119.38 159.05,119.38 161.59,119.38 164.13,119.38 166.67,119.38 169.21,119.38 171.75,119.38 174.29,119.38 176.83,119.38 157.78,121.92 160.32,121.92 162.86,121.92 165.4,121.92 167.94,121.92 170.48,121.92 173.02,121.92 178.1,121.92 156.51,124.46 159.05,124.46 161.59,124.46 164.13,124.46 166.67,124.46 169.21,124.46 171.75,124.46
Vref: C8.2 R8.1 U1.8 | length 19.3
  Top Layer w0.762: C8.2 U1.8 86.868,74.295 87.884,73.279 R8.1@99.441,73.279
pads on no net: IC1.6 IC1.11 P1.2 P1.6 Tx1.4 Tx1.11
copper on no net:
  other v3: 106.045,47.752 111.125,47.752 78.486,49.784 154.305,52.705 159.385,52.705 164.465,52.705 78.486,54.864 78.486,59.944 78.486,65.024 78.613,70.104 78.486,75.184 110.617,77.089 78.613,80.264 78.613,85.344 174.752,85.344 78.624,90.413 78.486,95.504 78.486,100.584
  other v4: 78.74,39.878 175.26,39.878 78.74,123.19 175.26,123.19
  other v5: 113.284,121.92 138.684,121.92

## Polygon pours and split planes (outlines as drawn)
Iso_5V on Top Layer "Secondary_Control_ISO_5V" (solid, pour order 10): 126.492,79.756 126.492,37.084 180.34,37.084 180.34,79.756
5V on Top Layer "Primary_Control_5V" (solid, pour order 6): 73.66,101.346 89.281,101.346 89.281,85.852 104.775,85.852 104.775,79.756 125.349,79.756 125.349,37.084 73.66,37.084
Iso_GND on Top Layer "ISO_GND_L01_P009" (solid, pour order 9): 134.239,98.425 143.383,98.425 143.383,97.409 161.544,97.409 161.544,113.284 177.419,113.284 177.419,81.788 134.239,81.788
NetCON1_1 on Top Layer "NETCON1_1_L01_P022" (solid, pour order 22): 73.66,114.3 88.9,114.3 88.9,125.984 73.66,125.984
20V on Top Layer "20V_L01_P012" (solid, pour order 12): 89.789,112.014 96.139,112.014 96.139,114.427 102.235,114.427 102.235,101.981 108.458,101.981 108.458,104.648 117.729,104.648 117.729,125.984 89.789,125.984
Vout on Top Layer "VOUT_L01_P008" (solid, pour order 8): 144.78,108.585 155.448,108.585 155.448,125.984 180.34,125.984 180.34,114.3 160.147,114.3 160.147,98.679 144.78,98.679
NetD1_1 on Top Layer "NETD1_1_L01_P007" (solid, pour order 7): 134.239,104.648 143.637,104.648 143.637,109.474 154.305,109.474 154.305,125.984 134.239,125.984
NetC7_2 on Top Layer "NETC7_2_L01_P004" (solid, pour order 4): 102.108,101.219 105.537,101.219 105.537,96.393 102.108,96.393
GND on Top Layer "GND_L01_P002" (solid, pour order 2): 88.9,113.157 88.9,111.252 96.901,111.252 96.901,113.157 100.584,113.157 100.584,101.981 76.835,101.981 76.835,113.157
I_Fb on Top Layer "I_FB_L01_P001" (solid, pour order 1): 90.678,93.98 97.79,93.98 97.79,96.52 100.584,96.52 100.584,101.219 90.678,101.219
Vd on Top Layer "VD_L01_P000" (solid, pour order 0): 107.188,95.25 107.188,98.298 117.856,98.298 117.856,81.788 107.188,81.788 107.188,88.138 99.06,88.138 99.06,95.25
GND on Bottom Layer "Primary_Control_GND" (solid, pour order 5): 73.66,101.346 89.281,101.346 89.281,85.852 104.775,85.852 104.775,79.756 125.349,79.756 125.349,37.084 73.66,37.084
Iso_GND on Bottom Layer "ISO_GND_L02_P017" (solid, pour order 17): 134.239,98.425 143.383,98.425 143.383,97.409 161.544,97.409 161.544,113.284 180.34,113.284 180.34,81.788 134.239,81.788
Iso_GND on Bottom Layer "Secondary_Control_ISO_GND" (solid, pour order 11): 126.492,79.756 126.492,37.084 180.34,37.084 180.34,79.756
NetCON1_1 on Bottom Layer "NETCON1_1_L02_P023" (solid, remove dead copper, pour order 23): 73.66,114.3 88.9,114.3 88.9,125.984 73.66,125.984
20V on Bottom Layer "20V_L02_P021" (solid, pour order 21): 89.789,112.014 96.139,112.014 96.139,114.427 102.235,114.427 102.235,101.981 108.458,101.981 108.458,104.648 117.729,104.648 117.729,125.984 89.789,125.984
GND on Bottom Layer "GND_L02_P020" (solid, pour order 20): 88.9,113.157 88.9,111.252 96.901,111.252 96.901,113.157 100.584,113.157 100.584,101.981 73.66,101.981 73.66,113.157
NetD1_1 on Bottom Layer "NETD1_1_L02_P019" (solid, pour order 19): 134.239,104.648 143.637,104.648 143.637,109.474 154.305,109.474 154.305,125.984 134.239,125.984
Vout on Bottom Layer "VOUT_L02_P018" (solid, pour order 18): 144.78,108.585 155.448,108.585 155.448,125.984 180.34,125.984 180.34,114.3 160.147,114.3 160.147,98.679 144.78,98.679
I_Fb on Bottom Layer "I_FB_L02_P016" (solid, pour order 16): 94.361,93.98 97.79,93.98 97.79,96.52 100.584,96.52 100.584,101.219 94.361,101.219
NetC7_2 on Bottom Layer "NETC7_2_L02_P015" (solid, pour order 15): 102.108,101.219 105.537,101.219 105.537,96.393 102.108,96.393
Vd on Bottom Layer "VD_L02_P014" (solid, pour order 14): 107.188,95.25 107.188,98.298 117.856,98.298 117.856,81.788 107.188,81.788 107.188,88.138 99.06,88.138 99.06,95.25

## Keep-outs
Keep-Out Layer:
  the board outline again, w0.254

## Silkscreen, mask and mechanical layers (free items; w line width, h text height)
Top Overlay:
  drawing of 70 lines, arcs and shapes, not listed
  text "OUTPUT" at 170.053,117.221 h1.3 r270
  text "INPUT" at 84.328,110.744 h1.3 r90
  text "Flyback EduKit (Rev 2.0)" at 143.764,79.488 h1.1
  text "Duleepa, Seho & Jack" at 143.764,77.329 h1.1
  text "March 2021" at 143.764,75.17 h1.1
  text "SN:" at 153.162,41.148 h1.1
Mechanical 13:
  lines w0.254: 125.984,37.465 125.984,125.095 ; 73.66,39.624 ccw(c76.2,39.624) 76.2,37.084 177.8,37.084 ccw(c177.8,39.624) 180.34,39.624 180.34,123.444 ccw(c177.8,123.444) 177.8,125.984 76.2,125.984 ccw(c76.2,123.444) 73.66,123.444 73.66,39.624

## Text inside footprints (layer, text, board x,y; h text height)
C1: Top Overlay "+" at 94.488,114.808 h1.5 r270
C2: Top Overlay "+" at 157.48,107.569 h1.5
U2: Top Overlay "*" at 118.618,68.326 h1.27; Mechanical 7 "Default Padstyle: OX65Y65D45P" at 117.066,61.233 h1.27; Mechanical 7 "Pin 1 Padstyle: EX65Y65D45P" at 117.701,59.709 h1.27; Mechanical 7 "Alt 1 Padstyle: OX60Y90D30P" at 117.701,58.185 h1.27; Mechanical 7 "Alt 2 Padstyle: OX90Y60D30P" at 117.701,56.661 h1.27; Mechanical 7 "0.1in/2.54mm" at 121.539,77.133 h0.64; Mechanical 7 "0.256in/6.502mm" at 112.469,70.517 h0.64; Mechanical 7 "-0.079in/-2mm" at 135.316,69.517 h0.64; Mechanical 7 "0.472in/11.989mm" at 123.734,63.9 h0.64